# Altium PCB RFM69HCW_Atmega328PB_PCBDoc.pcbdoc
Units mil, origin at the board's own origin, x right, y up, seen from the top; angles counter-clockwise.
Board outline 3500 x 2595 mil, 2 copper layers (Top Layer, Bottom Layer); 34 components, 45 nets, 133 pads, 158 vias.
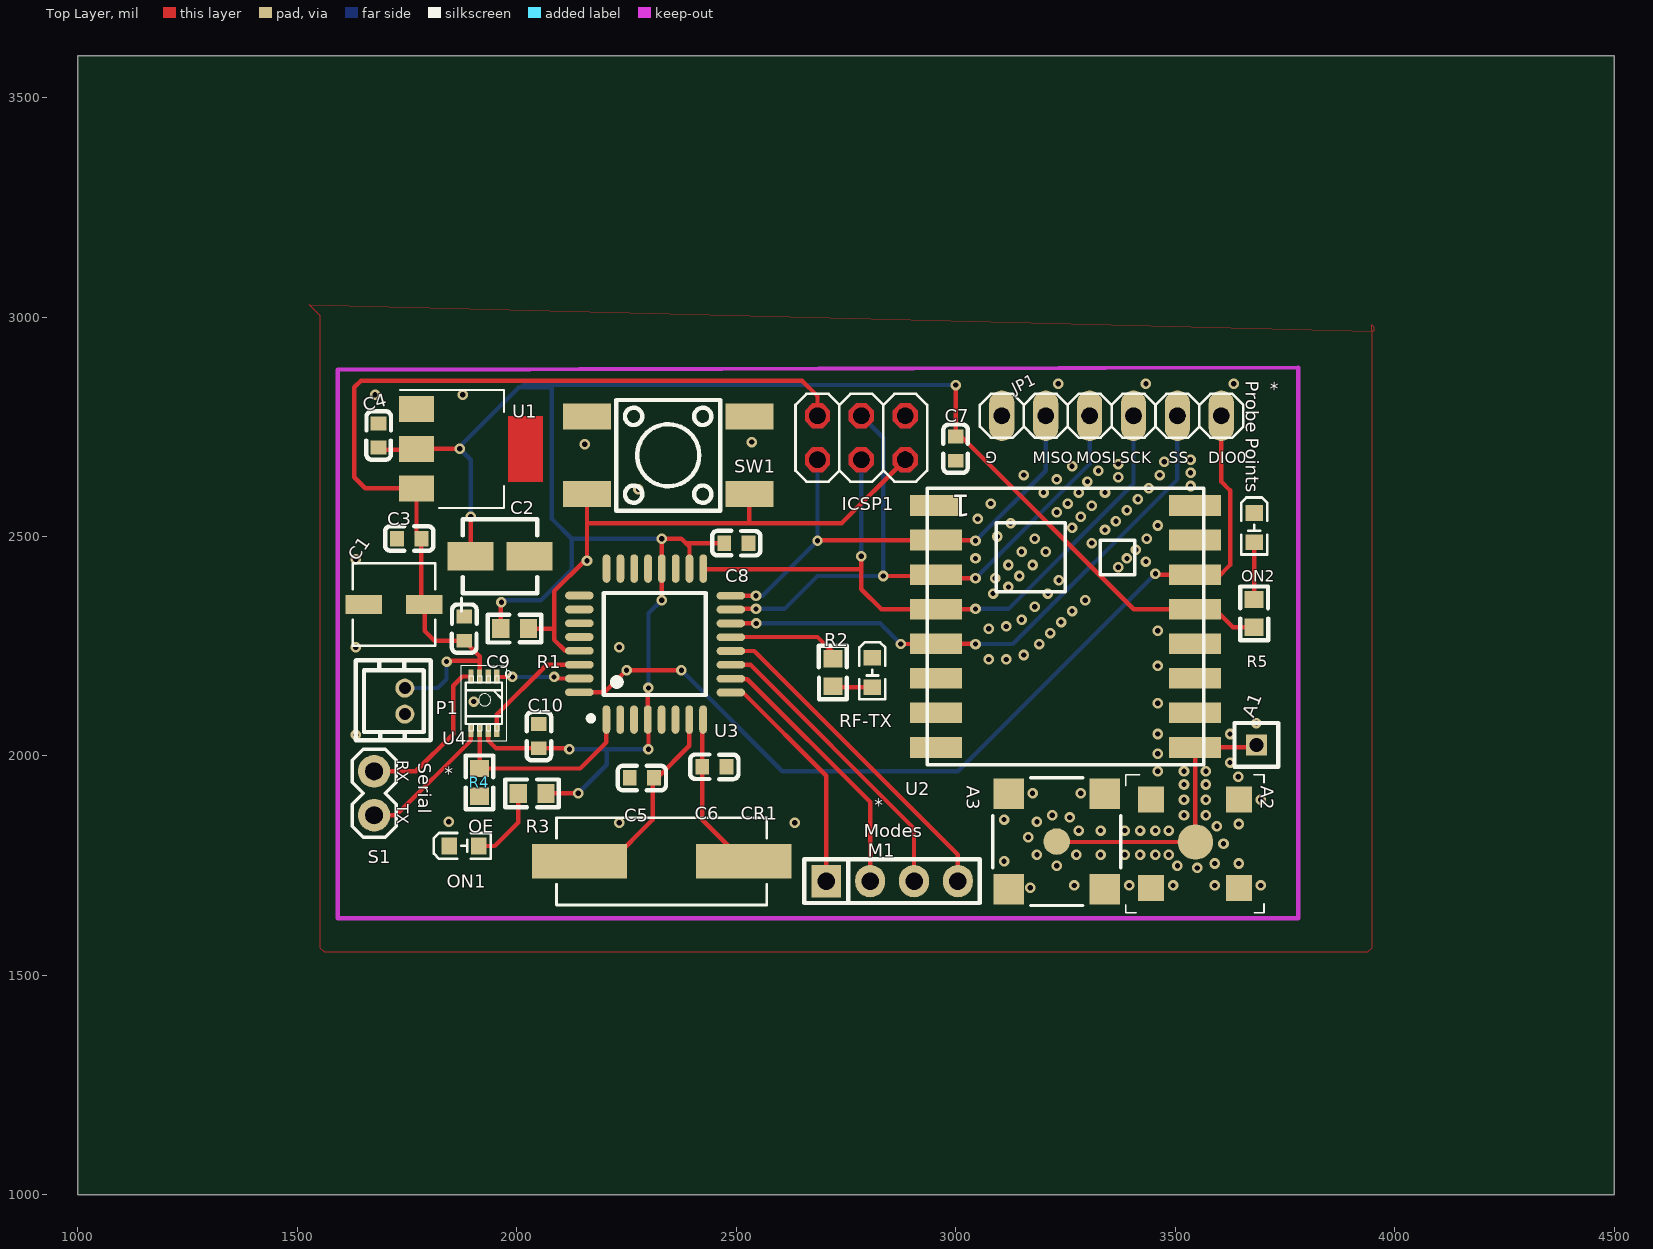
[diagram p0: Top Layer view]
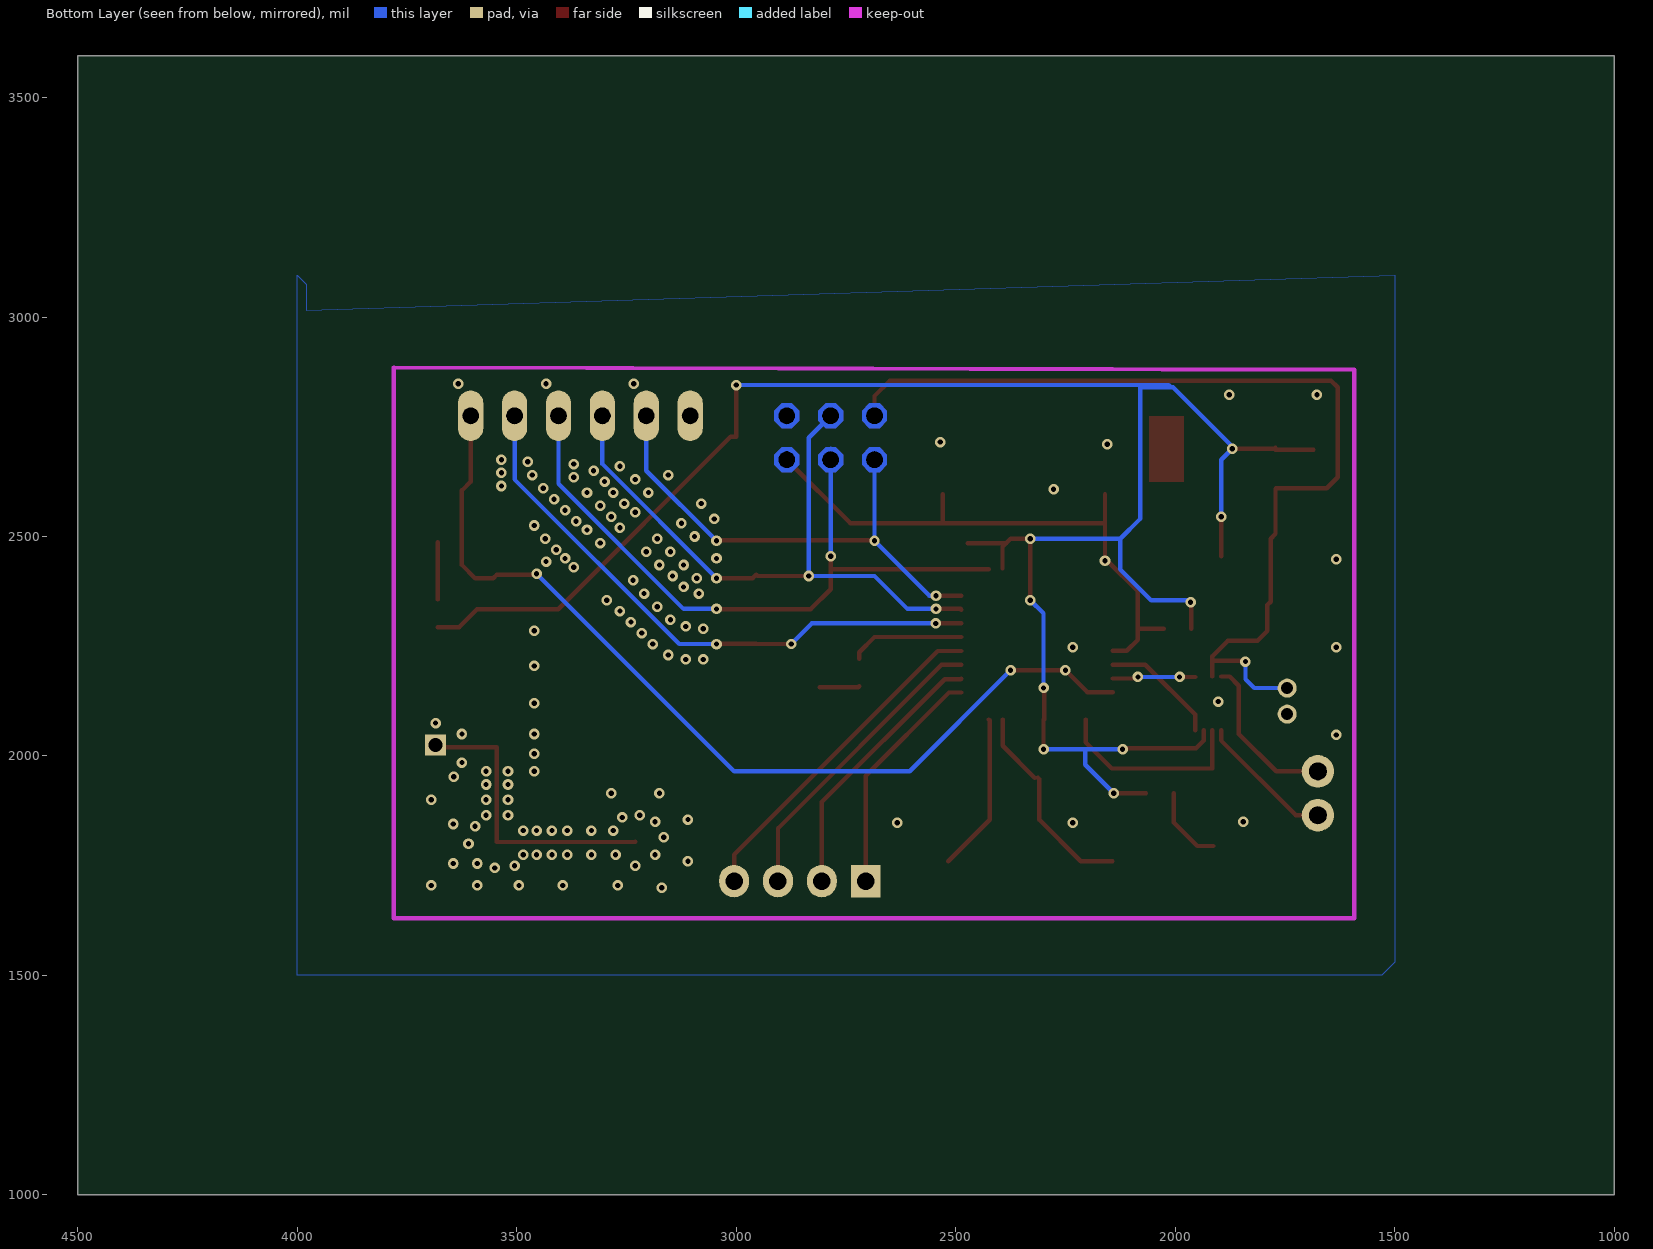
[diagram p1: Bottom Layer view, seen from below]

## Layer stack, top to bottom
Top Layer: signal copper (thickness not stored)
Dielectric: dielectric 12.6, FR-4, Dk 4.8
Bottom Layer: signal copper (thickness not stored)

## Board outline
4500,1000 1000,1000 1000,3595 4500,3595

## Components (designator, comment, footprint, x,y, rotation, side; value= is the part's Value field where it differs from the comment)
A1 "ANT_Hole" M1X1 3685,2025 r0 top
A2 "CONSMA001-SMD-G-ND" RF_SMA_RECEPTICAL_VERTICAL_CONSMA001-SMD-G 3545,1800 r0 top
A3 "CONSMA002-SMD" CON-SMA-SMD-RA 3230,1805 r0 top
C1 "1uF" PCAP_4X5.4-ELECT_NCA 1720,2345 r180 top
C2 "10uF" UWT(4X5.4) 1950,2455 r0 top
C3 "100nF" C0603 1755.04,2495 r0 top
C4 "100nF" C0603 1685.04,2730 r270 top
C5 "22pF" C0603 2285,1950 r180 top
C6 "22pF" C0603 2450,1975 r0 top
C7 "100nF" C0603 3000,2700 r90 top
C8 "100nF" C0603 2500,2485 r180 top
C9 "100nF" C0603 1880,2290 r270 top
C10 "100nF" C0603 2050,2045 r270 top
CR1 "9C-16.000MAAJ-T" CRYSTAL_TXC_9C_TXC 2330,1760 r180 top
ICSP1 "PINHD-2X3" 2X03 2785,2725 r0 top
JP1 "PINHD-1X6TH" 1X06-TH 3355,2775 r0 top
M1 "_CON_HEADER_1X04" M1X4 2955,1715 r0 top
ON1 "LTST-C191KGKT" LED0603-RD 1880.04,1795.03 r0 top
ON2 "LTST-C191KGKT" LED0603-RD 3680,2520 r270 top
P1 "HM3172" ZH-1.5-2A 1745,2125 r90 top
R1 "10K" R0603 1995,2290 r0 top
R2 "1K" R0603 2720,2190 r90 top
R3 "1K" R0603 2035.03,1915 r180 top
R4 "100K" R0603 1915.03,1940 r270 top
R5 "1K" R0603 3680,2325 r90 top
RF-TX "LTST-C191KRKT" LED0603-RD 2810,2190 r270 top
S1 "M02PTH" 1X02 1675,1965 r270 top
SW1 "GT-TC089A-H070-L1" SW-SMD_4P-L6.0-W6.4-P4.50-LS8.6 2345,2685 r180 top
U1 "LD1117S33CTR" SOT-223 1880,2760 r0 top
U2 "RFM69HCW" RFM69HCW-XXXS2 3250,2295 r0 top
U3 "ATMEGA328PB-AU" TQFP-32_L7.0-W7.0-P0.80-LS9.0-BL 2315,2255 r0 top
U4 "TXB0102" US8 1925,2120 r270 top
? "" ? 2687.5,2940.45 r0 top
? "" ? 3865.94,2257.29 r0 top

## Footprints (in the part's own frame and the unit in brackets; to place one, negate y for a bottom-side part, rotate by r counter-clockwise, add the part's x,y. Pads: shape width x height; smd on the part's side, far side on the other; paste and mask are expansions set on the pad)
1X02 [mil]
  round 74 hole 40 slot 40.2 at 90 deg: 1(0,0) 2(100,0)
  silkscreen extent -50,-50 150,50
1X06-TH [mil]
  oval 57.4x114.8 hole 37.4 slot 37.6 at 90 deg: 1(-250,0) 2(-150,0) 3(-50,0) 4(50,0) 5(150,0) 6(250,0)
  silkscreen extent -300,-50 300,50
2X03 [mil]
  round 0 hole 37.4 slot 37.6 at 0 deg: 1(-100,-50) 2(-100,50) 3(0,-50) 4(0,50)
  round 0 hole 37.4 slot 37.6 at 90 deg: 5(100,-50) 6(100,50)
  Top Layer region: -71.81,-38.32 -88.32,-21.81 -111.68,-21.81 -128.19,-38.32 -128.19,-61.68 -111.68,-78.19 -88.32,-78.19 -71.81,-61.68
  Top Layer region: -71.81,61.68 -88.32,78.19 -111.68,78.19 -128.19,61.68 -128.19,38.32 -111.68,21.81 -88.32,21.81 -71.81,38.32
  Top Layer region: 28.19,-38.32 11.68,-21.81 -11.68,-21.81 -28.19,-38.32 -28.19,-61.68 -11.68,-78.19 11.68,-78.19 28.19,-61.68
  Top Layer region: 28.19,61.68 11.68,78.19 -11.68,78.19 -28.19,61.68 -28.19,38.32 -11.68,21.81 11.68,21.81 28.19,38.32
  Top Layer region: 128.19,-38.32 111.68,-21.81 88.32,-21.81 71.81,-38.32 71.81,-61.68 88.32,-78.19 111.68,-78.19 128.19,-61.68
  Top Layer region: 128.19,61.68 111.68,78.19 88.32,78.19 71.81,61.68 71.81,38.32 88.32,21.81 111.68,21.81 128.19,38.32
  Bottom Layer region: -71.81,-38.32 -88.32,-21.81 -111.68,-21.81 -128.19,-38.32 -128.19,-61.68 -111.68,-78.19 -88.32,-78.19 -71.81,-61.68
  Bottom Layer region: -71.81,61.68 -88.32,78.19 -111.68,78.19 -128.19,61.68 -128.19,38.32 -111.68,21.81 -88.32,21.81 -71.81,38.32
  Bottom Layer region: 28.19,-38.32 11.68,-21.81 -11.68,-21.81 -28.19,-38.32 -28.19,-61.68 -11.68,-78.19 11.68,-78.19 28.19,-61.68
  Bottom Layer region: 28.19,61.68 11.68,78.19 -11.68,78.19 -28.19,61.68 -28.19,38.32 -11.68,21.81 11.68,21.81 28.19,38.32
  Bottom Layer region: 128.19,-38.32 111.68,-21.81 88.32,-21.81 71.81,-38.32 71.81,-61.68 88.32,-78.19 111.68,-78.19 128.19,-61.68
  Bottom Layer region: 128.19,61.68 111.68,78.19 88.32,78.19 71.81,61.68 71.81,38.32 88.32,21.81 111.68,21.81 128.19,38.32
  silkscreen extent -150,-100 150,100
C0603 [mm]
  rect 0.8x0.9 smd: 1(-0.7,0) 2(0.7,0)
  silkscreen extent -1.4,-0.7 1.4,0.72
CON-SMA-SMD-RA [mil]
  round 60.5 smd: 1(0,0)
  rect 69.5x69.5 smd: 2(-109,109) 3(109,109) 4(109,-109) 5(-109,-109)
  silkscreen extent -146,-146 146,146
CRYSTAL_TXC_9C_TXC [mil]
  rect 217x79 smd: 1(-187,0) 2(187,0)
  silkscreen extent -240,-100 240,100
LED0603-RD [mm]
  rect 0.9x1 smd: 1(-0.85,0) 2(0.85,0)
  silkscreen extent -1.75,-0.75 1.55,0.75
M1X1 [mil]
  rect 47.2x47.2 hole 31.4: 1(0,0)
  silkscreen extent -50,-50 50,50
M1X4 [mil]
  rect 68x74 hole 40: 1(-250,0)
  oval 68x74 hole 40: 2(-150,0) 3(-50,0) 4(50,0)
  silkscreen extent -300,-50 100,50
PCAP_4X5.4-ELECT_NCA [mil]
  rect 83x43 smd: 1(-69,0) 2(69,0)
  silkscreen extent -170,-94 94,94
R0603 [mm]
  rect 1x1.1 smd: 1(-0.8,0) 2(0.8,0)
  silkscreen extent -1.55,-0.8 1.55,0.81
RF_SMA_RECEPTICAL_VERTICAL_CONSMA001-SMD-G [mil]
  rect 59.05x59.05 smd: 1(-100.39,-100.39) 1(-100.39,100.39) 1(100.39,-100.39) 1(100.39,100.39)
  round 80.71 smd: 2(0.98,3.94)
  silkscreen extent -157,-157 157,157
RFM69HCW-XXXS2 [mm]
  rect 3x1.2 smd: 1(-7.5,7) 2(-7.5,5) 3(-7.5,3) 4(-7.5,1) 5(-7.5,-1) 6(-7.5,-3) 7(-7.5,-5) 8(-7.5,-7) 9(7.5,-7) 10(7.5,-5) 11(7.5,-3) 12(7.5,-1) 13(7.5,1) 14(7.5,3) 15(7.5,5) 16(7.5,7)
  silkscreen extent -8,-8 8,8
SOT-223 [mm]
  rect 2x1.5 smd: 1(-2.755,0.762) 2(-2.755,-1.538) 3(-2.755,-3.838)
  round 0 smd: 4(3.545,-1.538)
  Top Layer region: 2.545,0.362 4.545,0.362 4.545,-3.438 2.545,-3.438
  silkscreen extent -3.71,-4.95 2.3,1.87
SW-SMD_4P-L6.0-W6.4-P4.50-LS8.6 [mm]
  rect 2.8x1.5 smd: 1(-4.7,2.25) 2(4.7,2.25) 3(-4.7,-2.25) 4(4.7,-2.25)
  silkscreen extent -3,-3.2 3,3.2
TQFP-32_L7.0-W7.0-P0.80-LS9.0-BL [mm]
  oval 0.45x1.65 smd: 1(-2.817,-4.369) 2(-2.017,-4.369) 3(-1.217,-4.369) 4(-0.417,-4.369) 5(0.381,-4.369) 6(1.181,-4.369) 7(1.981,-4.369) 8(2.781,-4.369) 17(2.791,4.369) 18(1.991,4.369) 19(1.191,4.369) 20(0.391,4.369) 21(-0.406,4.369) 22(-1.206,4.369) 23(-2.007,4.369) 24(-2.807,4.369)
  oval 1.65x0.45 smd: 9(4.381,-2.804) 10(4.381,-2.004) 11(4.381,-1.204) 12(4.381,-0.404) 13(4.381,0.394) 14(4.381,1.194) 15(4.381,1.994) 16(4.381,2.794) 25(-4.381,2.804) 26(-4.381,2.004) 27(-4.381,1.204) 28(-4.381,0.404) 29(-4.381,-0.394) 30(-4.381,-1.194) 31(-4.381,-1.994) 32(-4.381,-2.794)
  silkscreen extent -3.86,-4.45 2.94,2.95
US8 [mil]
  rect 31.5x11.8 smd: 1(-61,29.5) 2(-61,9.8) 3(-61,-9.8) 4(-61,-29.5) 5(61,-29.5) 6(61,-9.8) 7(61,9.8) 8(61,29.5)
  silkscreen extent -87,-51 87,62
UWT(4X5.4) [mm]
  rect 2.65x1.65 smd: 1(-1.4,0) 2(2,0)
  silkscreen extent -1.85,-2.15 2.45,2.15
ZH-1.5-2A [mm]
  round 1.1 hole 0.7: 1(-0.751,0) 2(0.751,0)
  silkscreen extent -2.27,-1.5 2.35,2.84
? [mil]

## Via types
v1: diameter 24.02, hole 12.01, Top Layer to Bottom Layer, 146 vias
v2: diameter 24, hole 12, Top Layer to Bottom Layer, 8 vias
v3: diameter 23.62, hole 12.01, Top Layer to Bottom Layer, 4 vias

## Nets (pads, with @x,y where several pads share a name; then routed paths per layer and width w, separated by ;. In a path a pad name is that pad's centre, name@x,y a point inside that pad or via, vN(x,y) a via of type N, cw(c..) or ccw(c..) an arc to the next point about the centre after c; other vN are vias at no path point)
0/DIO0: JP1.6 U2.14 U3.32 | length 2149.7
  Top Layer w10: U3.32 2200,2145 v1(2250,2195) v1(2375,2195) ; v1(3455,2415) 3456.89,2413.11 U2.14 3553.38,2405 3595,2405 3625,2435 3625,2605 3605,2625 JP1.6
  Bottom Layer w10: v1(2375,2195) 2605,1965 3005,1965 v1(3455,2415)
(ADC2/PTCY)PC2: U3.25
(ADC3/PTCY)PC3: U3.26
(MISO1/ADC0/PTCY)PC0: U3.23
(SCK1/ADC1/PTCY)PC1: U3.24
(SCL0/ADC5/PTCY)PC5: U3.28
(SDA0/ADC4/PTCY)PC4: U3.27
(XCK0/T0/PTCXY)PD4: U3.2
+3.3V: C2.1 C4.2 C7.2 C8.2 C10.2 R1.1 R3.1 R5.1 U1.2 U2.13 U3.4 U3.18 U3.20 U4.7 | length 4892.9
  Top Layer w10: C4.2@1685,2697.4 U1.2@1771.5,2697.4 ; U1.2@1771.5,2702.4 1771.5,2699.5 v2(1870,2700) ; C2.1 1895,2455 v1(1895,2545) ; U4.7 1934.8,2035.2 1952.6,2017.4 C10.2 ; R1.1 1963.51,2348.51 v1(1965,2350) ; C10.2 2120,2017.44 v1(2120,2015) ; R3.1 v1(2140,1915) ; v1(2300,2015) 2300,2083 U3.4 2298.6,2153.6 v1(2300,2155) ; v1(2330,2355) U3.20 2330,2427.4 v1(2330,2495) 2375,2495 ; U3.18 2393.4,2476.6 2375,2495 ; C8.2 2385,2485 2375,2495 ; C7.2 v1(3000,2845) ; C7.2 3012.4,2727.6 3405.63,2334.37 U2.13 3590.63,2334.37 3631.5,2293.5 R5.1
  Bottom Layer w10: v1(1895,2545) 1895,2675 v2(1870,2700) 1870,2705 2005,2840 2080,2840 2080,2540 2125,2495 ; v1(1965,2350) 1965,2355 2055,2355 2125,2425 2125,2495 ; 2010,2840 2015,2845 v1(3000,2845) ; v1(2120,2015) v1(2300,2015) ; v1(2140,1915) 2205,1980 2205,2015 ; v1(2300,2155) 2300,2325 v1(2330,2355) ; v1(2330,2495) 2150,2495 2125,2495
+5V: C1.1 C3.2 C9.2 ICSP1.2 P1.2 U1.3 U4.3 | length 2224.2
  Top Layer w10: v1(1840,2215) 1841.82,2216.82 1915.2,2216.82 ; U4.3 1915.2,2227.24 C9.2 1812.56,2262.44 1790,2285 1790,2344 C1.1 1782.56,2351.45 C3.2 1771.52,2506.03 U1.3 1770.4,2610 1655,2610 1630,2635 1630,2840 1645,2855 2650,2855 2685,2820 ICSP1.2
  Bottom Layer w10: P1.2 1820,2155 1840,2175 v1(1840,2215)
ANT: A1.1 A2.2 A3.1 U2.9 | length 676.5
  Top Layer w10: A3.1 3231.06,1803.94 A2.2 ; A2.2@3545.27,1804.65 U2.9 3685,2019.41 A1.1
DIO1: U2.15
DIO2: U2.16
DIO3: U2.11
DIO4: U2.12
DIO5: U2.7
GND: A2.1 A3.2 A3.3 A3.4 A3.5 C1.2 C2.2 C3.1 C4.1 C5.2 C6.2 C7.1 C8.1 C9.1 C10.1 ICSP1.6 JP1.1 ON1.1 ON2.1 P1.1 R4.2 RF-TX.1 SW1.3 SW1.4 U1.1 U2.1 U2.8 U2.10 U3.5 U3.21 U4.2
  other v1: 3170,1700 3270,1705 3395,1705 3495,1705 3590,1705 3695,1705 3550,1745 3230,1750 3505,1750 3590,1755 3645,1755 3110,1760 3185,1775 3275,1775 3330,1775 3385,1775 3420,1775 3455,1775 3485,1775 3610,1800 3165,1815 3280,1830 3330,1830 3385,1830 3420,1830 3455,1830 3485,1830 3595,1840 3645,1845 2233.29,1847.83 2633.29,1847.83 1845,1850 3185,1850 3110,1855 3260,1860 3220,1865 3520,1865 3570,1865 3520,1900 3570,1900 3695,1900 3175,1915 3285,1915 3520,1935 3570,1935 3643.71,1952.76 3460,1965 3520,1965 3570,1965 3625,1985 3460,2005 1633.29,2047.83 3460,2050 3625,2050 3685,2075 3460,2120 1902.11,2123.83 3460,2205 3075,2220 3115,2220 3155,2230 1633.29,2247.83 2233.29,2247.83 3190,2255 3215,2280 3460,2285 3075,2290 3115,2295 3240,2305 3150,2310 3265,2330 3180,2340 3295,2355 3085,2370 3210,2370 3120,2385 3235,2400 3090,2405 3145,2410 3370,2430 3120,2435 3175,2435 3433.29,2442.83 1633.29,2447.83 3045,2450 3390,2450 3150,2465 3205,2465 3410,2470 3310,2485 3180,2495 3435,2495 3095,2500 3340,2515 3265,2520 3460,2525 3125,2530 3365,2535 3050,2540 3285,2545 3230,2555 3390,2560 3310,2570 3080,2575 3255,2575 3415,2585 3200,2600 3280,2600 3340,2600 2277.11,2607.89 3440,2610 3535,2615 3300,2625 3230,2630 3370,2635 3155,2640 3465,2640 3535,2645 3325,2650 3265,2660 3370,2665 3475,2670 3535,2675 2155,2710 2535,2715 1677.11,2822.89 1877.11,2822.89 3233.29,2847.83 3433.29,2847.83 3633.29,2847.83
M_SW1: M1.4 U3.12 | length 769.7
  Top Layer w10: U3.12 2540.9,2239.1 3005,1775 M1.4
M_SW2: M1.3 U3.11 | length 691.8
  Top Layer w10: U3.11 2532.4,2207.6 2905,1835 M1.3
M_SW3: M1.2 U3.10 | length 613.9
  Top Layer w10: U3.10 2488.6,2175 2525,2175 2805,1895 M1.2
M_SW4: M1.1 U3.9 | length 536
  Top Layer w10: U3.9 2515.4,2144.6 2705,1955 M1.1
MISO: ICSP1.1 JP1.2 U2.2 U3.16 | length 1148.2
  Top Layer w10: U3.16 v2(2545,2365) ; v3(2685,2490) 2685,2491.85 2954.73,2491.85 3043.15,2491.85 v2(3045,2490)
  Bottom Layer w10: v2(2545,2365) 2560,2365 v3(2685,2490) ICSP1.1 ; v2(3045,2490) 3205,2650 JP1.2
MOSI: ICSP1.4 JP1.3 U2.3 U3.15 | length 1457.2
  Top Layer w10: U3.15 2489,2335 v2(2545,2335) ; v2(2835,2410) 2951.62,2410 U2.3 2962.84,2405 v2(3045,2405)
  Bottom Layer w10: v2(2545,2335) 2610,2335 2685,2410 v2(2835,2410) 2835,2725 ICSP1.4 ; v2(3045,2405) 3305,2665 JP1.3
OE: R4.1 U3.1 U4.6 | length 453.4
  Top Layer w10: U4.6 1915.2,1971.69 R4.1 2144.69,1971.49 2204.1,2030.9 U3.1
PE0(PTCXY/SDA1/ICP4/ACO): U3.3
PE1(PTCXY/SCL1/T4): U3.6
PE2(PTCY/ADC6/ICP3/SS1): U3.19
PE3(PTCY/ADC7/T3/MOSI1): U3.22
R2_1: R2.1 RF-TX.2 | length 90.8
  Top Layer w10: R2.1 2721.97,2156.54 RF-TX.2
R3_2: ON1.2 R3.2 | length 178.7
  Top Layer w10: ON1.2 1950,1795 2003.5,1848.5 R3.2
R5_2: ON2.2 R5.2 | length 130
  Top Layer w10: R5.2 ON2.2
RESET: U2.6
RF-TX: R2.2 U3.13 | length 261.5
  Top Layer w10: U3.13@2487.5,2271 2685,2271 2720,2236 R2.2
RST: ICSP1.5 R1.2 SW1.1 SW1.2 U3.29 | length 1343.5
  Top Layer w10: R1.2 2060,2290 2085,2290 ; U3.29 2110.5,2239.5 2085,2265 2085,2315 2085,2375 2155,2445 v1(2160,2445) v1(2160,2445) SW1.2 ; 2160,2530 2740,2530 ICSP1.5 ; 2530,2530 SW1.1
RX3.3: U3.31 U4.1 | length 189.5
  Top Layer w10: U4.1@1954.5,2180 v1(1990,2180) ; v1(2085,2180) 2088.5,2176.5 U3.31
  Bottom Layer w10: v1(1990,2180) v1(2085,2180)
RX5: S1.1 U4.4 | length 374.4
  Top Layer w10: S1.1 1770,1965 1855,2050 1855,2160 1876,2181 U4.4
S$37: 
S$39: 
S$68: 
SCK: ICSP1.3 JP1.4 U2.4 U3.17 | length 1622.2
  Top Layer w10: U3.17@2425,2425 2785,2425 v3(2785,2455) 2785,2380 2830.6,2334.4 U2.4 ; U2.4 3044.37,2334.37 v2(3045,2335)
  Bottom Layer w10: v3(2785,2455) 2785,2700 ; v2(3045,2335) 3120,2335 3405,2620 JP1.4
SS: JP1.5 U2.5 U3.14 | length 1337.8
  Top Layer w10: U3.14 v3(2545.74,2302) ; v3(2875,2255) 2954.1,2255 U2.5 3044.37,2255.63 v2(3045,2255)
  Bottom Layer w10: v3(2545.74,2302) 2828,2302 v3(2875,2255) ; v2(3045,2255) 3130,2255 3505,2630 JP1.5
TX3.3: U3.30 U4.8 | length 270.5
  Top Layer w10: U4.8 1954.5,2094.5 2068,2208 U3.30
TX5: S1.2 U4.5 | length 314.6
  Top Layer w10: S1.2 1725,1865 1895.5,2035.5 U4.5
U3_7: C5.1 CR1.2 U3.7 | length 465.6
  Top Layer w10: CR1.2 2215,1760 2310,1855 2310,1947.44 C5.1 ; C5.1@2320,1950 2393,2023 U3.7
U3_8: C6.1 CR1.1 U3.8 | length 363
  Top Layer w10: U3.8 2422.45,2080.95 C6.1 2422.45,1854.55 CR1.1
pads on no net: U1.4

## Polygon pours and split planes (outlines as drawn)
GND on Bottom Layer (solid): 1500,3095 1500,1530 1530,1500 4000,1500 4000,3095 3980,3075 3980,3015
GND on Top Layer (solid): 1527.5,3027.5 3947.5,2967.62 3947.5,2982.5 3952.5,2977.5 3952.5,2967.5 3947.5,2967.62 3947.5,1562.5 3937.5,1552.5 1562.5,1552.5 1552.5,1562.5 1552.5,3002.5 1527.5,3027.5

## Silkscreen, mask and mechanical layers (free items; w line width, h text height)
Top Overlay:
  text "Probe" at 3660.24,2855 h29.53 r270
  text "*" at 3737.66,2822.4 h29.53 r59
  text "Points" at 3660.24,2725 h29.53 r270
  text "G" at 3095,2692.8 h25.59 r180
  text "MISO" at 3175,2667.2 h25.59
  text "MOSI" at 3275,2667.2 h25.59
  text "SCK" at 3375,2667.2 h25.59
  text "SS" at 3485,2667.2 h25.59
  text "DIO0" at 3575,2667.2 h25.59
  text "RX" at 1727.2,1990 h25.59 r270
  text "Serial" at 1775.24,1985 h29.53 r270
  text "*" at 1857.66,1947.4 h29.53 r59
  text "TX" at 1727.2,1890 h25.59 r270
  text "OE" at 1890,1825.24 h29.53

## Text inside footprints (layer, text, board x,y; h text height)
A2: Document "REF" at 3506.61,1890.55 h29.53
CR1: Document "Copyright 2016 Accelerated Designs. All rights reserved." at 2442,1762.5 h5 r180; Top Overlay "*" at 2802.34,1892.4 h29.53 r301; Document "*" at 2583.13,1694.86 h39.37 r301; Document "0.079in/2.007mm" at 2040.69,1710.33 h39.37 r2; Document "0.591in/15.011mm" at 2085.69,1775.33 h39.37 r2; Document "0.157in/3.988mm" at 2070.69,1650.33 h39.37 r2
M1: Top Overlay "Modes" at 2790,1815.24 h29.53
U2: Top Overlay "1" at 3034.06,2595 h50 r180